# EAGLE board Adafruit CLUE nRF52840 Express (EAGLE 9.4.1)
REV: C
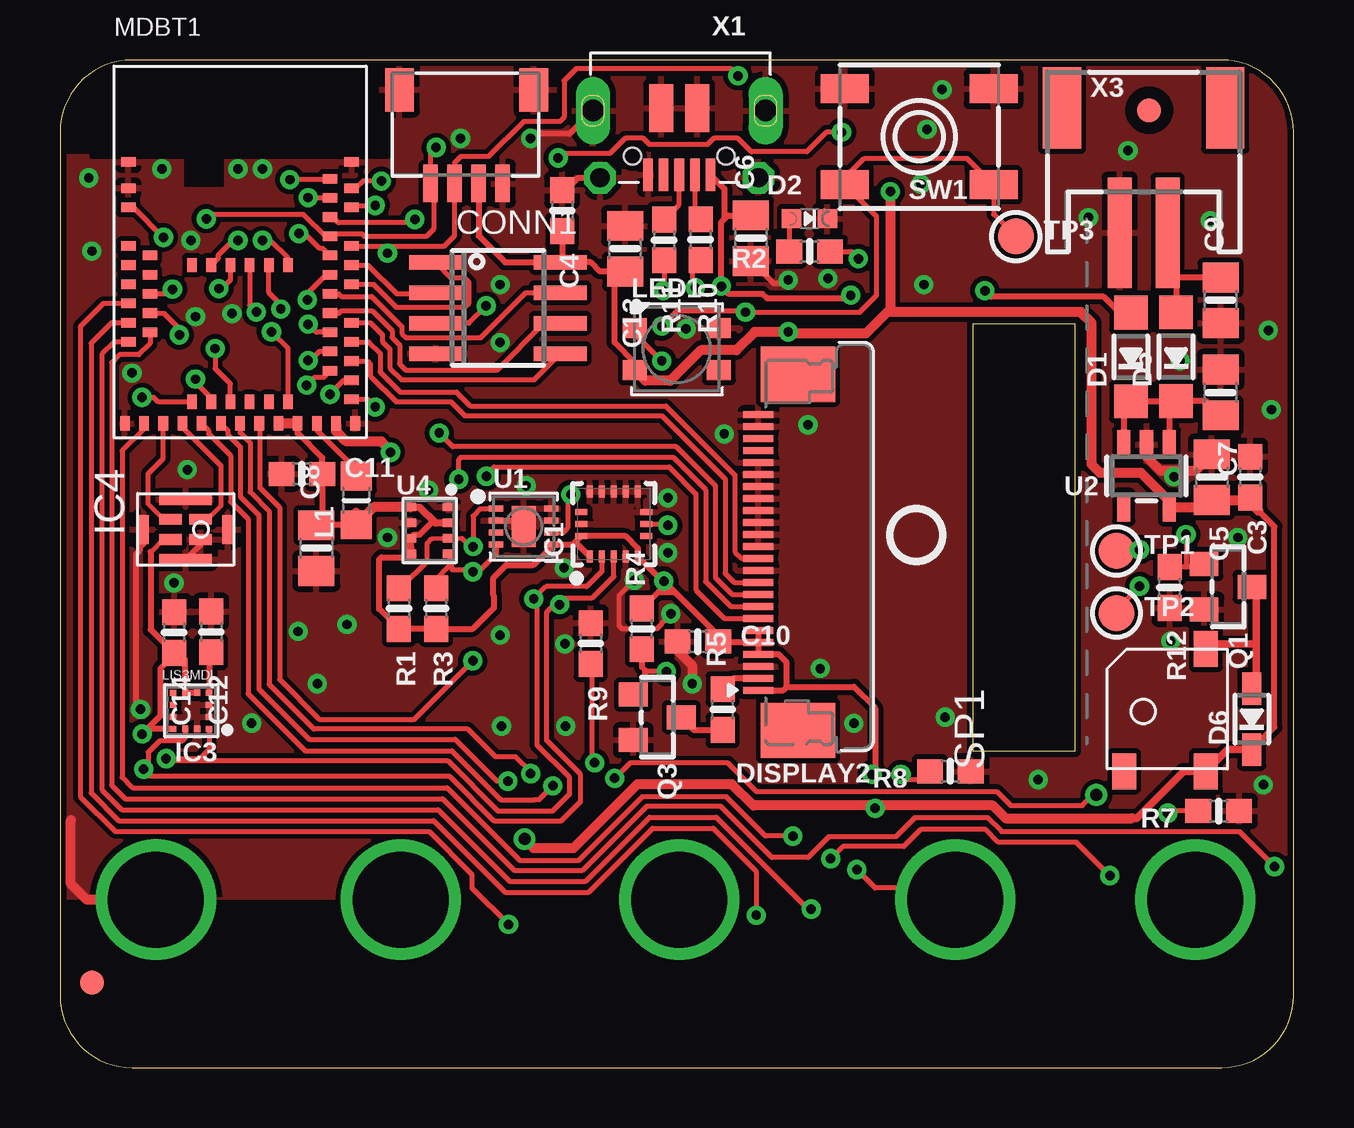
[diagram p0: board, top side]
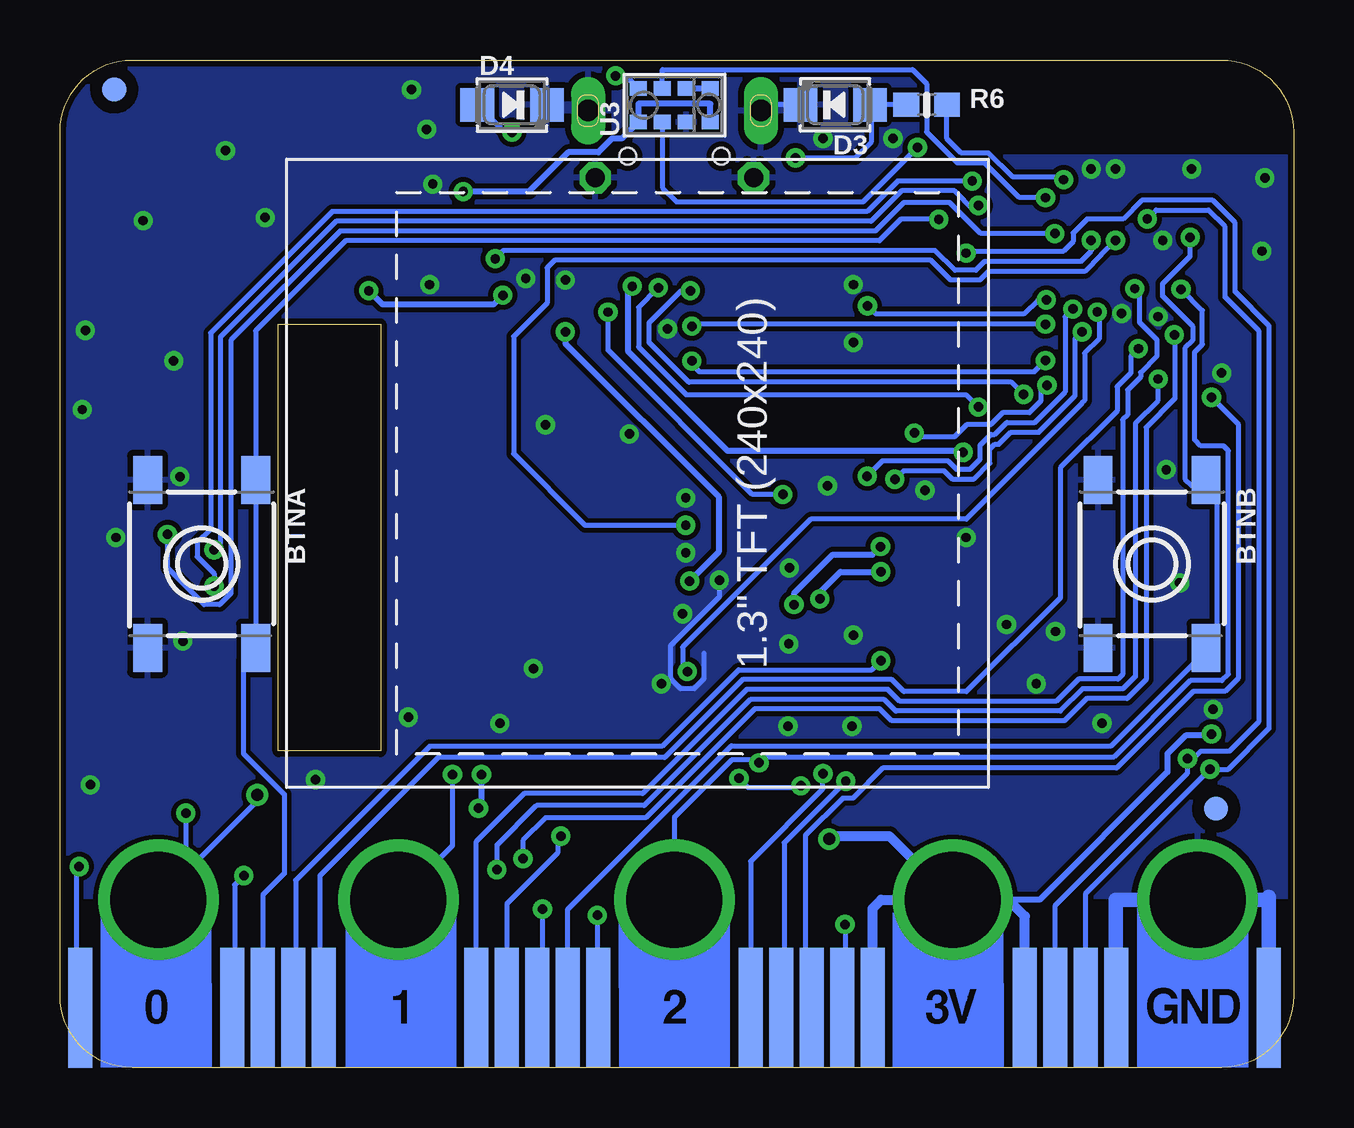
[diagram p1: board, bottom side, seen from below]

Size 51.4 x 42 mm. Coordinates in mm from the lower left corner, seen from the top.
Outline: 48.4,42 3,42 arc90 0,39 0,3 arc90 3,0 48.4,0 arc90 51.4,3 51.4,39 arc90 48.4,42
Outline: 38.04,30.99 38.04,13.2 42.3,13.2 42.3,30.99 38.04,30.99
Copper layers (1*16): Top 0.035mm / dielectric 1.5mm / Bottom 0.035mm
Design rules "adafruit": minimum track width 8mil, minimum drill 15.5mil, track to track 8mil, track to pad 8mil, pad to pad 8mil, via to via 8mil, smd to smd 8mil, copper to edge 10mil, drill to drill 8mil, minimum pad ring 10mil, minimum via ring 8mil, stop-mask expansion 2mil, vias tented up to drill 20mil, thermal gap 10mil
Net classes: 1 power: width 0.254 mm; 2 lowpower: width 0.305 mm, drill 0.483 mm

## Footprints (pad centres in the part's own frame; a part is rotated, then mirrored left to right if it is on the bottom)
6MMX6MM_TACTILE_SMT = smd 2 x 1.2: A -3.5,-2.25; A' 3.5,-2.25; B -3.5,2.25; B' 3.5,2.25
0603-NO = smd 1.075 x 1: 1 -0.85,0; 2 0.85,0
0805-NO = smd 1.24 x 1.5: 1 -0.95,0; 2 0.95,0
JST_SH4 = smd 0.6 x 1.55: 1 -1.5,2.514; 2 -0.5,2.514; 3 0.5,2.514; 4 1.5,2.514 | smd 1.2 x 1.8: MT1 -2.8,-1.386; MT2 2.8,-1.386
SOD-123 = smd 1.4 x 1.4: A 1.85,0; C -1.85,0
CHIPLED_0603_NOOUTLINE = smd 0.8 x 0.8: A 0,-0.75; C 0,0.75
EVERLIGHT_45-21 = smd 1.4 x 1.4: A -1.45,0; K 1.45,0
SOD-323 = smd 1.35 x 0.8: A 1.27,0; C -1.27,0
TFT_1.3IN_240X240_24P = smd 0.28 x 1.25: 1 4.55,13.378; 2 5.05,13.378; 3 5.55,13.378; 4 6.05,13.378; 5 6.55,13.378; 6 7.05,13.378; 7 7.55,13.378; 8 8.05,13.378; 9 8.55,13.378; 10 9.05,13.378; 11 9.55,13.378; 12 10.05,13.378; 13 10.55,13.378; 14 11.05,13.378; 15 11.55,13.378; 16 12.05,13.378; 17 12.55,13.378; 18 13.05,13.378; 19 13.55,13.378; 20 14.05,13.378; 21 14.55,13.378; 22 15.05,13.378; 23 15.55,13.378; 24 16.05,13.378 | smd 2.3 x 3.1: MNT1 2.88,11.722; MNT2 17.72,11.722
FIDUCIAL_1MM = smd 1 x 1: 1 0,0
LGA16_3X3MM = smd 0.5 x 0.25: 1 -1.35,1; 2 -1.35,0.5; 3 -1.35,0; 4 -1.35,-0.5; 5 -1.35,-1; 9 1.35,-1; 10 1.35,-0.5; 11 1.35,0; 12 1.35,0.5; 13 1.35,1 | smd 0.25 x 0.5: 6 -0.5,-1.35; 7 0,-1.35; 8 0.5,-1.35; 14 0.5,1.35; 15 0,1.35; 16 -0.5,1.35
SOIC8_150MIL = smd 0.6 x 2.2: 1 -1.905,-2.6; 2 -0.635,-2.6; 3 0.635,-2.6; 4 1.905,-2.6; 5 1.905,2.6; 6 0.635,2.6; 7 -0.635,2.6; 8 -1.905,2.6
LGA12_2X2MM = smd 0.275 x 0.25: 1 -0.75,0.75; 2 -0.75,0.25; 3 -0.75,-0.25; 4 -0.75,-0.75; 7 0.75,-0.75; 8 0.75,-0.25; 9 0.75,0.25; 10 0.75,0.75 | smd 0.25 x 0.275: 5 -0.25,-0.75; 6 0.25,-0.75; 11 0.25,0.75; 12 -0.25,0.75
SPK0415HM4H = smd 0.45 x 0.95: 1 0.425,-0.625; 2 0.425,0.625; 3 -0.425,0.625; 4 -0.425,-0.625 | smd 1.2 x 0.45: 5 0,-1.75; 7 0,1.75 | smd 0.45 x 2.2: 6 1.25,0; 8 -1.25,0
_0805MP = smd 1.2 x 1.3: 1 -1.016,0; 2 1.016,0
LED3535 = smd 1 x 0.85: 1 -1.75,0.875; 2 -1.75,-0.875; 3 1.75,-0.875; 4 1.75,0.875
MICROBIT_EDGE = smd 1 x 5: +3V3 8.255,2.5; +3V3@2 14.605,2.5; GND 18.415,2.5; GND@2 24.765,2.5; P3 -24.765,2.5; P4 -18.415,2.5; P5 -17.145,2.5; P6 -15.875,2.5; P7 -14.605,2.5; P8 -8.255,2.5; P9 -6.985,2.5; P10 -5.715,2.5; P11 -4.445,2.5; P12 -3.175,2.5; P13 3.175,2.5; P14 4.445,2.5; P15 5.715,2.5; P16 6.985,2.5; P19 15.875,2.5; P20 17.145,2.5 | drill 4: +3V3@1 11.6,7; GND@1 21.8,7; P0 -21.5,7; P1 -11.5,7; P2 0,7
MDBT50 = smd 0.6 x 0.4: 1 -4.65,3.75; 2 -4.65,2.65; 3 -4.65,1.85; 4 -4.65,0.25; 5 -3.75,-0.15; 6 -4.65,-0.55; 7 -3.75,-0.95; 8 -4.65,-1.35; 9 -3.75,-1.75; 10 -4.65,-2.15; 11 -3.75,-2.55; 12 -4.65,-2.95; 13 -3.75,-3.35; 14 -4.65,-3.75; 34 4.65,-6.15; 35 4.65,-5.35; 36 3.75,-4.95; 37 4.65,-4.55; 38 3.75,-4.15; 39 4.65,-3.75; 40 3.75,-3.35; 41 4.65,-2.95; 42 3.75,-2.55; 43 3.75,-1.75; 44 4.65,-1.35; 45 3.75,-0.95; 46 4.65,-0.55; 47 3.75,-0.15; 48 4.65,0.25; 49 3.75,0.65; 50 3.75,1.45; 51 4.65,1.85; 52 3.75,2.25; 53 4.65,2.65; 54 3.75,3.05; 55 4.65,3.75 | smd 0.4 x 0.6: 15 -4.8,-7.15; 16 -4,-7.15; 17 -3.2,-7.15; 18 -2.4,-7.15; 19 -2,-6.25; 20 -1.6,-7.15; 21 -1.2,-6.25; 22 -0.8,-7.15; 23 -0.4,-6.25; 24 0,-7.15; 25 0.4,-6.25; 26 0.8,-7.15; 27 1.2,-6.25; 28 1.6,-7.15; 29 2,-6.25; 30 2.4,-7.15; 31 3.2,-7.15; 32 4,-7.15; 33 4.8,-7.15; 56 -2,-0.55; 57 -1.2,-0.55; 58 -0.4,-0.55; 59 0.4,-0.55; 60 1.2,-0.55; 61 2,-0.55
SOT23-WIDE = smd 1 x 1.2: 1 -0.95,-1; 2 0.95,-1; 3 0,1
BUZZER_SMT_5MM = smd 1.5 x 1: + -2.6,-1.6; - 2.5,-1.6; MT -2.6,1.8
EVQ-Q2_SMALLER = smd 2 x 1.2: A -3.1,-2; A' 3.1,-2; B -3.1,2; B' 3.1,2
TESTPOINT_ROUND_1.5MM = smd 1.5 x 1.5: P$1 0,0
SHT3X = smd 0.6 x 0.25: 1 -1.15,0.75; 2 -1.15,0.25; 3 -1.15,-0.25; 4 -1.15,-0.75; 5 1.15,-0.75; 6 1.15,-0.25; 7 1.15,0.25; 8 1.15,0.75 | smd 1 x 1.7: THERMAL 0,0
SOT23-5 = smd 0.55 x 1.2: 1 -0.95,-1.3; 2 0,-1.3; 3 0.95,-1.3; 4 0.95,1.3; 5 -0.95,1.3
APDS-9960 = smd 0.6 x 0.72: 1 0.7,1.505; 2 0.7,0.505; 3 0.7,-0.495; 4 0.7,-1.495; 5 -0.7,-1.495; 6 -0.7,-0.495; 7 -0.7,0.505; 8 -0.7,1.505
BMP280 = smd 0.5 x 0.35: 1 0.8,0.975; 2 0.8,0.325; 3 0.8,-0.325; 4 0.8,-0.975; 5 -0.8,-0.975; 6 -0.8,-0.325; 7 -0.8,0.325; 8 -0.8,0.975
4UCONN_20329_SLIM = smd 1 x 2: BASE@1 -0.75,-2; BASE@2 0.75,-2 | smd 0.4 x 1.35: D+ 0,0.775; D- -0.65,0.775; GND 1.3,0.775; ID 0.65,0.775; VBUS -1.3,0.775 | drill 0.8 pad 1.27 octagon: SPRT@1 -3.3,0.9; SPRT@2 3.3,0.9 | drill 0.9 pad 1.27 long: SPRT@3 -3.6,-1.9; SPRT@4 3.6,-1.9 | hole 0.7: -1.95,0; 1.95,0
JSTPH2 = smd 1 x 4.6: 1 -1,-3.7; 2 1,-3.7 | smd 1.6 x 3.4: NC1 -3.4,1.5; NC2 3.4,1.5

## Placement (x,y rotation side)
BTNA  6mm  [6MMX6MM_TACTILE_SMT]  45.5,21 270 bottom
BTNB  6mm  [6MMX6MM_TACTILE_SMT]  5.9,21 270 bottom
C3  0.1uF  [0603-NO]  49.59,24.61 270 top
C4  0.1uF  [0603-NO]  20.92,35.72 270 top
C5  10uF  [0805-NO]  48,24.61 270 top
C6  10uF  [0805-NO]  28.79,34.57 90 top
C7  10uF  [0805-NO]  48.36,28.14 270 top
C8  10uF  [0805-NO]  10.68,21.65 90 top
C9  10uF  [0805-NO]  48.36,31.98 90 top
C10  0.1uF  [0603-NO]  26.58,17.75 0 top
C11  0.1uF  [0603-NO]  10.08,24.75 0 top
C12  0.1uF  [0603-NO]  6.3,18.17 270 top
C13  10uF  [0805-NO]  23.55,34.13 270 top
C14  0.1uF  [0603-NO]  4.75,18.13 270 top
CONN1  STEMMA_I2C_QT  [JST_SH4]  16.95,39.37 180 top
D1  MBR120  [SOD-123]  44.62,29.62 90 top
D2  RED  [CHIPLED_0603_NOOUTLINE]  31.23,35.39 270 top
D3  L130-5780001400001  [EVERLIGHT_45-21]  19.1,40.13 180 bottom
D4  L130-5780001400001  [EVERLIGHT_45-21]  32.57,40.13 0 bottom
D5  MBR120  [SOD-123]  46.5,29.64 90 top
D6  1N4148  [SOD-323]  49.66,14.53 90 top
DISPLAY2  DISP_LCD_ST7789_1.3IN  [TFT_1.3IN_240X240_24P]  42.47,11.18 90 top
FID1  FIDUCIAL_1MM  [FIDUCIAL_1MM]  1.33,3.55 0 top
FID2  FIDUCIAL_1MM  [FIDUCIAL_1MM]  45.38,39.91 0 top
FID3  FIDUCIAL_1MM  [FIDUCIAL_1MM]  49.14,40.77 0 bottom
FID4  FIDUCIAL_1MM  [FIDUCIAL_1MM]  3.23,10.79 0 bottom
IC1  LSM6DS33  [LGA16_3X3MM]  23.07,22.66 90 top
IC2  GD25Q16  [SOIC8_150MIL]  18.25,31.67 270 top
IC3  LIS3MDL  [LGA12_2X2MM]  5.46,14.88 180 top
IC4  MIC_PDM  [SPK0415HM4H]  5.23,22.43 270 top
L1  DNP  [_0805MP]  12.34,23.64 90 top
LED1  WS2812B3535  [LED3535]  25.7,29.95 0 top
MB1  MICRO:BIT_EDGE  [MICROBIT_EDGE]  25.8,0 0 bottom
MDBT1  MDBT50  [MDBT50]  7.5,34 0 top
Q1  BSS138  [SOT23-WIDE]  48.67,20.04 270 top
Q3  BSS138  [SOT23-WIDE]  24.88,14.61 270 top
R1  4.7K  [0603-NO]  14.12,19.14 270 top
R2  1K  [0603-NO]  31.23,34.02 180 top
R3  4.7K  [0603-NO]  15.67,19.14 270 top
R4  10K  [0603-NO]  24.25,18.29 90 top
R5  10  [0603-NO]  27.61,14.92 90 top
R6  10  [0603-NO]  15.29,40.13 0 bottom
R7  1Mohm  [0603-NO]  48.28,10.69 180 top
R8  1Mohm  [0603-NO]  37.1,12.36 180 top
R9  1Mohm  [0603-NO]  22.11,17.68 270 top
R10  22  [0603-NO]  26.69,34.51 270 top
R11  22  [0603-NO]  25.17,34.5 270 top
R12  10K  [0603-NO]  46.23,20.02 270 top
SP1  SPEAKER_BUZZER5MM  [BUZZER_SMT_5MM]  46.14,14.95 90 top
SW1  KMR2  [EVQ-Q2_SMALLER]  35.8,38.8 180 top
TP1  [TESTPOINT_ROUND_1.5MM]  44.02,21.54 0 top
TP2  [TESTPOINT_ROUND_1.5MM]  44.02,18.95 0 top
TP3  [TESTPOINT_ROUND_1.5MM]  39.83,34.65 0 top
U1  SHT30  [SHT3X]  19.32,22.56 0 top
U2  AP2112(3.3V)  [SOT23-5]  45.27,24.67 180 top
U3  APDS-9960  [APDS-9960]  25.8,40.12 90 bottom
U4  BMP280  [BMP280]  15.4,22.39 0 top
U$10  [PCBFEAT-REV-056]  35.68,22.21 0 top
U$37  [CLUE_BACK]  -0.2,0 0 top
U$52  [CLUE_FRONT]  51.4,0 0 bottom
X1  4u20329  [4UCONN_20329_SLIM]  25.8,37.99 180 top
X3  JSTPH  [JSTPH2]  45.15,38.5 0 top

## Library data of the parts
BTNA BTNB C3-C14 CONN1 D1-D6 IC2 IC4 L1 LED1 MDBT1 Q1 Q3 R1-R12 SP1 SW1 TP1-TP3 U1 U2 U$10 X1 X3 = microbuilder
DISPLAY2 = adafruit_display
FID1-FID4 = microbuilder; BOM: EXCLUDE
IC1 IC3 U3 U4 = adafruit_sensor
MB1 = adafruit_connector
U$37 U$52 = silks

## Nets
3.3V [power]: C3.2 C4.2 C5.2 C8.2 C10.2 C11.2 C13.2 C14.2 CONN1.2 D6.C DISPLAY2.1 DISPLAY2.4 DISPLAY2.5 DISPLAY2.6 IC1.1 IC1.5 IC1.16 IC2.8 IC3.5 IC3.6 IC3.10 IC4.1 L1.1 LED1.2 MB1.+3V3 MB1.+3V3@1 MB1.+3V3@2 MDBT1.28 MDBT1.30 R1.2 R3.2 R4.2 SP1.+ U1.5 U2.5 U3.5 U3.8 U4.2 U4.5 U4.6 U4.8
APDS_IRQ: MDBT1.52 U3.2
BACKLIGHT: MDBT1.59 Q3.1 R4.1
CAP1: C12.2 IC3.4
D0/AIN2: MB1.P0 MDBT1.20 R7.2
D1/AIN3: MB1.P1 MDBT1.21 R8.2
D2/AIN4: MB1.P2 MDBT1.9 R9.2
D3/AIN5: MB1.P3 MDBT1.13
D4/AIN6: MB1.P4 MDBT1.11
D5/BUTTON_A: BTNA.B BTNA.B' MB1.P5 MDBT1.50
D6: MB1.P6 MDBT1.26
D7: MB1.P7 MDBT1.23
D8: MB1.P8 MDBT1.58
D9: MB1.P9 MDBT1.16
D10/AIN7: MB1.P10 MDBT1.14
D11/BUTTON_B: BTNB.B BTNB.B' MB1.P11 MDBT1.3
D12/AIN0: MB1.P12 MDBT1.12
D13/SCK: MB1.P13 MDBT1.24
D14/MISO: MB1.P14 MDBT1.22
D15/MOSI: MB1.P15 MDBT1.19
D16/AIN1: MB1.P16 MDBT1.10
D19/SCL: CONN1.4 IC1.2 IC3.1 MB1.P19 MDBT1.49 R3.1 U1.4 U3.7 U4.4
D20/SDA: CONN1.3 IC1.3 IC3.11 MB1.P20 MDBT1.48 R1.1 U1.1 U3.1 U4.3
D+: R11.1 X1.D+
D-: R10.1 X1.D-
DCCH: L1.2 MDBT1.31
GND: BTNA.A BTNA.A' BTNB.A BTNB.A' C3.1 C4.1 C5.1 C6.1 C7.1 C8.1 C9.1 C10.1 C11.1 C12.1 C13.1 C14.1 CONN1.1 CONN1.MT1 CONN1.MT2 D2.C D3.K D4.K DISPLAY2.3 DISPLAY2.11 DISPLAY2.13 DISPLAY2.14 DISPLAY2.15 DISPLAY2.16 DISPLAY2.17 DISPLAY2.18 DISPLAY2.19 DISPLAY2.20 DISPLAY2.23 DISPLAY2.24 IC1.4 IC1.8 IC1.9 IC1.10 IC1.11 IC1.12 IC1.13 IC1.15 IC2.4 IC3.2 IC3.3 IC3.9 IC3.12 IC4.2 IC4.5 IC4.6 IC4.7 IC4.8 LED1.4 MB1.GND MB1.GND@1 MB1.GND@2 MDBT1.1 MDBT1.2 MDBT1.15 MDBT1.33 MDBT1.55 Q1.2 Q3.2 R7.1 R8.1 R9.1 R12.2 SW1.A SW1.A' U1.2 U1.7 U1.8 U1.THERMAL U2.2 U3.6 U4.1 U4.7 X1.BASE@1 X1.BASE@2 X1.GND X1.SPRT@1 X1.SPRT@2 X1.SPRT@3 X1.SPRT@4 X3.1
LED1: MDBT1.61 R2.1
LEDK: DISPLAY2.2 R5.2
LSM_IRQ: IC1.7 MDBT1.57
N$1: Q3.3 R5.1
N$2: U3.3 U3.4
N$3: D3.A D4.A R6.1
N$4: D6.A Q1.3 SP1.-
N$5: D2.A R2.2
NEOPIX: LED1.1 MDBT1.38
PDM_CLK: IC4.3 MDBT1.18
PDM_DAT: IC4.4 MDBT1.17
QSPI_CS: IC2.1 MDBT1.44
QSPI_DATA0: IC2.5 MDBT1.41
QSPI_DATA1: IC2.2 MDBT1.46
QSPI_DATA2: IC2.3 MDBT1.45
QSPI_DATA3: IC2.7 MDBT1.43
QSPI_SCK: IC2.6 MDBT1.42
RESET: MDBT1.40 SW1.B SW1.B' TP3.P$1 U1.6
SPKR: MDBT1.47 Q1.1 R12.1
SWCLK: MDBT1.53 TP2.P$1
SWDIO: MDBT1.51 TP1.P$1
TFT_CS: DISPLAY2.8 MDBT1.29
TFT_DC: DISPLAY2.10 MDBT1.37
TFT_MOSI: DISPLAY2.12 MDBT1.39
TFT_RESET: DISPLAY2.7 MDBT1.60
TFT_SCK: DISPLAY2.9 MDBT1.36
USBD+: MDBT1.35 R11.2
USBD-: MDBT1.34 R10.2
VBAT [power]: C9.2 D5.A X3.2
VBUS [power]: C6.2 D1.A MDBT1.32 X1.VBUS
VHI [power]: C7.2 D1.C D5.C U2.1 U2.3
WHITE_LED: MDBT1.54 R6.2

## Tracks (layer width: path | path; a pad name or v marks a point on that pad's centre or on a via)
3.3V  (via drill 0.39, 0.5)
  Top 0.178: IC4.1 4.31,22.01 3.8,21.5 3.78,21.5
  Top 0.254: DISPLAY2.5 DISPLAY2.4 29.95,17.23 30.28,16.89 30.28,15.88 | DISPLAY2.1 30.13,15.73 30.28,15.88 | DISPLAY2.6 DISPLAY2.5 | DISPLAY2.5 27.46,17.73 C10.2 27.43,18.01 25.61,19.84 | C5.2 47.68,23.34 47.68,23.37 | 49.49,23.66 C3.2 | IC3.5 IC3.6 5.21,17 4.93,17.28 C14.2 | 21.37,21.81 U1.5 20.47,21.68 19.74,20.95 18.6,20.95 18.05,20.41 18.05,19.68 18.09,19.65 18.09,19.18 17.2,18.29 R3.2 R1.2 13.29,19.12 13.29,21.18 13.39,21.27 14.69,21.27 | 21.37,21.81 IC1.16 23.57,22.16 24.07,21.65 IC1.5 25.1,20.28 v25.16,20.28 25.61,19.84 | IC1.1 21.57,21.81 21.37,21.81 | CONN1.2 17.45,34.68 18.55,33.57 IC2.8 | C4.2 20.92,33.65 IC2.8 | C13.2 23.3,33.19 | 23.3,33.19 22.5,33.19 22.11,33.57 IC2.8 | LED1.2 23.95,29.38 23.11,30.23 23.11,32.99 23.3,33.19 | U2.5 46.22,23.62 | R4.2 24.95,19.84 25.61,19.84 | 12.33,23.12 L1.1 10.71,22.63 C8.2 10.93,22.85 C11.2 10.93,25.42 9.9,26.45 MDBT1.30 | IC3.10 3.64,14.12 v3.42,13.91 4.19,14.67 4.19,16.64 4.75,17.2 C14.2 | C14.2 3.78,18.26 3.78,21.5 | U4.6 14.75,22.21 14.99,22.21 15.49,22.71 15.63,22.71 | D6.C 50.6,14.2 50.6,22.55 49.93,23.22 | 30.28,15.88 33.07,15.88 33.96,14.99 33.96,12.35 v33.84,12.22 | 33.96,10.92 v33.96,10.81
  Top 0.305: U4.5 14.61,21.4 | 14.61,21.4 14.69,21.27 | 14.61,21.4 U4.6 | U4.8 15,23.35 15.63,22.71 15.65,22.7 U4.2 | 44.67,10.39 44.86,10.39 46.82,12.35 SP1.+ 48.65,13.26 D6.C
  Top 0.406: MDBT1.30 MDBT1.28 | U2.5 47.68,23.37 | C5.2 49.49,23.66 49.93,23.22 | LED1.2 24.4,28.63 25.43,28.63 26.7,29.91 28.18,29.91 28.95,30.67 v30.34,30.67 30.41,30.61 33.58,30.61 34.47,31.5 34.6,31.5 | 46.22,23.62 45.05,24.79 43.34,24.79 42.98,25.15 42.98,31.05 42.54,31.5 34.6,31.5 | v34.6,36.52 34.6,31.5 | v19.36,9.53 19.74,9.14 21.39,9.14 24.06,11.81 28,11.81 28.89,10.92 33.96,10.92 38.87,10.92 39.4,10.39 44.67,10.39 | 12.33,23.12 12.34,23.11 L1.1 13.08,23.37 U4.8
  Bottom 0.254: U3.5 24.3,40.18 27.3,40.18 U3.8 28,38.72 28.4,38.72 28.97,38.15 30.23,38.15 31.86,36.52 v34.6,36.52 | v25.16,20.28 23.96,21.49 23.96,23.8 30.34,30.19 v30.34,30.67 | v3.42,13.91 3.49,13.84 4.5,13.84 5.26,13.08 5.26,12.32 10.58,7 13.77,7 | v33.96,10.81 33.84,10.94 v33.84,12.22
  Bottom 0.406: MB1.+3V3@2 11.2,6.32 11.88,7 13.77,7 MB1.+3V3@1 | MB1.+3V3 17.55,6.64 17.18,7 MB1.+3V3@1 | v19.36,9.53 19.23,9.65 16.85,9.65 MB1.+3V3@1
APDS_IRQ  (via drill 0.39)
  Top 0.203: MDBT1.52 10.36,36.25 v10.34,36.27
  Bottom 0.203: v10.34,36.27 11.43,36.27 12.88,37.72 14.01,37.72 15.29,39 15.29,41.01 15.88,41.6 26.3,41.6 U3.2
BACKLIGHT  (via drill 0.39)
  Top 0.203: MDBT1.59 7.9,31.78 v8.18,31.5 | v25.26,16.51 24.44,16.51 24.38,16.57 24.25,16.7
  Top 0.254: R4.1 24.25,16.7 | 24.38,16.57 24.38,16.05 Q3.1
  Bottom 0.203: v8.18,31.5 8.11,31.42 8.11,30.38 8.7,29.78 8.7,27.81 8.82,27.7 8.82,27.69 13.64,22.87 20.11,22.87 25.45,17.53 25.45,16.7 v25.26,16.51
CAP1
  Top 0.254: C12.2 6.21,17.23 IC3.4
D0/AIN2  (via drill 0.39, 0.5)
  Top 0.203: v43.18,11.37 43.04,11.37 42.6,10.92 39.61,10.92 39.02,11.51 29.01,11.51 27.83,12.7 23.75,12.7 v23.11,12.06 | v20.53,11.75 19.95,11.16 19.77,11.16 19.78,11.17 18.37,11.17 16.33,13.21 10.21,13.21 7.84,15.59 7.84,22.86 7.11,23.59 7.11,25.51 6.19,26.42 6.19,26.55 MDBT1.20 | R7.2 46.15,10.69 v46.15,10.6
  Bottom 0.203: v43.18,11.37 43.18,11.12 MB1.P0 46.15,8.14 v46.15,10.6 | v23.11,12.06 22.73,11.68 20.6,11.68 v20.53,11.75
D1/AIN3  (via drill 0.39)
  Top 0.203: MDBT1.21 6.3,27.92 5.64,28.57 v5.64,28.7 | v33.2,8.26 33.96,7.49 36.81,7.49 MB1.P1 | v35.04,12.22 35.26,12 35.89,12 R8.2
  Bottom 0.203: v5.64,28.7 5.64,27.81 6.59,26.86 6.59,16.3 7.11,15.79 8.79,15.79 9.72,14.86 16.57,14.86 17.08,15.37 22.62,15.37 27.06,10.92 31.55,10.92 33.2,9.27 v33.2,8.26 | MB1.P1 35.04,9.26 v35.04,12.22
D2/AIN4  (via drill 0.39)
  Top 0.203: v4.69,32.45 4.49,32.25 MDBT1.9 | R9.2 22.15,16.79 22.15,12.83 v22.28,12.71
  Bottom 0.203: MB1.P2 25.8,10.43 23.4,12.83 22.28,12.83 v22.28,12.71 22.03,12.96 7.47,12.96 4.3,16.13 2.98,16.13 2.72,16.39 2.72,25.72 2.92,25.91 3.86,25.91 4.12,26.17 4.12,29.82 3.8,30.14 3.8,31.56 v4.69,32.45
D3/AIN5  (via drill 0.39)
  Top 0.203: MDBT1.13 3.75,30.18 3.29,29.72 2.47,29.72 2.15,29.4 2.15,11.78 2.71,11.21 15.94,11.21 18.92,8.23 21.77,8.23 24.44,10.9 27.52,10.9 29.66,8.76 31.17,8.76 32.03,9.62 34.82,9.62 35.61,10.41 38.66,10.41 39.23,9.84 49.14,9.84 v50.6,8.38
  Bottom 0.203: v50.6,8.38 50.73,8.26 50.73,2.66 MB1.P3
D4/AIN6  (via drill 0.39)
  Top 0.203: v4.97,30.54 4.97,30.8 4.32,31.45 MDBT1.11 | v32.11,8.71 32.62,9.22 35.16,9.22 35.87,9.93 38.58,9.93 39.1,9.4 42.34,9.4 v43.74,8
  Bottom 0.203: v32.11,8.71 32.11,9.47 31.17,10.41 26.99,10.41 22.45,14.96 17.25,14.96 16.74,14.45 9.55,14.45 8.62,15.38 6.94,15.38 6.15,16.17 6.15,26.69 4.94,27.9 4.94,30.54 v4.97,30.54 | v43.74,8 44.12,7.62 44.12,2.59 MB1.P4
D5/BUTTON_A  (via drill 0.39)
  Top 0.203: MDBT1.50 11.37,35.45 11.6,35.22 14.64,35.22 v14.79,35.36
  Bottom 0.203: MB1.P5 42.95,7.2 42.06,8.09 42.06,11.39 43.76,13.1 43.76,16.99 BTNA.B' BTNA.B 43.25,30.72 39.5,34.47 17.26,34.47 16.37,35.36 v14.79,35.36
D6  (via drill 0.39)
  Top 0.203: MDBT1.26 8.33,26.82 8.33,24.18 9.15,23.35 9.15,16.18 10.81,14.52 14.76,14.52 v17.2,16.96
  Bottom 0.203: MB1.P6 41.67,2 41.58,1.91 41.58,7.81 36,13.39 26.31,13.39 23.12,16.59 17.57,16.59 v17.2,16.96
D7  (via drill 0.39)
  Top 0.203: MDBT1.23 7.1,28.51 6.47,29.14 v6.47,29.97
  Bottom 0.203: v6.47,29.97 6.79,29.65 6.79,28.96 7.36,28.38 7.36,27.38 9.72,25.01 9.72,19.59 13.63,15.67 16.23,15.67 16.74,16.18 22.95,16.18 26.21,12.92 35.64,12.92 40.57,8 40.57,2.66 MB1.P7
D8  (via drill 0.39)
  Top 0.203: MDBT1.58 7.1,32.83 6.75,32.47 v6.62,32.47
  Bottom 0.203: MB1.P8 34.05,9.43 32.06,11.43 27.13,11.43 22.78,15.77 16.91,15.77 16.4,15.27 9.89,15.27 8.96,16.2 7.31,16.2 7.12,16.39 7.12,27.01 6.92,27.21 6.92,28.25 6.38,28.79 6.38,28.98 5.7,29.66 5.7,30.35 6.43,31.08 6.43,32.28 v6.62,32.47
D9  (via drill 0.39)
  Top 0.203: MDBT1.16 3.5,26.62 2.59,25.72 2.59,12.09 3.02,11.67 16.13,11.67 19.16,8.64 21.61,8.64 24.27,11.3 27.74,11.3 29.39,9.65 v30.53,9.65
  Bottom 0.203: v30.53,9.65 30.66,9.53 30.66,8.94 32.78,6.82 MB1.P9
D10/AIN7  (via drill 0.39)
  Top 0.203: MDBT1.14 2.25,30.25 1.74,29.74 1.74,11.59 2.57,10.75 15.75,10.75 18.73,7.77 21.9,7.77 24.57,10.44 27.33,10.44 31.17,6.6 v31.3,6.6
  Bottom 0.203: v31.3,6.6 31.3,2.72 MB1.P10
D11/BUTTON_B  (via drill 0.39)
  Top 0.203: v4.31,34.61 3.07,35.85 MDBT1.3
  Bottom 0.203: MB1.P11 30.25,6.59 23.42,13.41 7.6,13.41 3.36,17.65 3.52,17.65 3.65,17.53 BTNB.B' 3.2,17.95 3.2,24.05 BTNB.B 3.9,24.26 4.25,24.26 4.53,24.54 4.53,29.99 4.21,30.31 4.21,30.91 5.46,32.16 5.46,32.68 4.31,33.83 v4.31,34.61
D12/AIN0  (via drill 0.39)
  Top 0.203: MDBT1.12 2.15,31.05 1.3,30.2 1.3,11.45 2.45,10.29 15.57,10.29 18.55,7.32 22.03,7.32 24.69,9.98 27.21,9.98 29.01,8.19 v29.01,6.35
  Bottom 0.203: v29.01,6.35 29.01,2.54 MB1.P12
D13/SCK  (via drill 0.39)
  Top 0.203: v19.61,12.26 19.61,12.32 18.98,12.95 18.15,12.95 16.99,14.12 10.58,14.12 8.71,15.98 8.71,23.19 7.92,23.98 7.92,26.04 7.5,26.46 MDBT1.24
  Bottom 0.203: v19.61,12.26 19.61,11.62 22.62,8.61 MB1.P13
D14/MISO  (via drill 0.39)
  Top 0.203: v18.66,11.94 18.21,11.94 16.46,13.68 10.38,13.68 8.28,15.79 8.28,23.03 7.51,23.8 7.51,25.87 7,26.39 7,26.55 MDBT1.22
  Bottom 0.203: MB1.P14 21.23,2.63 21.23,9.37 v18.66,11.94
D15/MOSI  (via drill 0.39)
  Top 0.203: MDBT1.19 4.1,27.75 3.91,27.94 v3.42,27.94
  Bottom 0.203: MB1.P15 20.34,2.75 20.34,9.68 18.79,11.23 18.37,11.23 17.12,12.48 7.38,12.48 4.18,15.68 2.86,15.68 2.31,16.23 2.31,26.83 v3.42,27.94
D16/AIN1  (via drill 0.39)
  Top 0.203: MDBT1.10 1.8,31.85 0.85,30.9 0.85,11.29 2.31,9.84 15.38,9.84 17.16,8.05 17.16,7.49 v18.69,5.97
  Bottom 0.203: v18.69,5.97 18.69,2.63 MB1.P16
D19/SCL  (via drill 0.39)
  Top 0.203: R3.1 15.67,20.38 16.19,20.89 16.31,20.89 | IC1.2 22.57,20.68 21.94,20.05 20.25,20.05 v19.74,19.54 19.87,19.54 19.87,13.46 21.24,12.09 21.24,11.41 20.53,10.7 18.25,10.7 16.15,12.8 4.42,12.8 v4.42,12.88 5.82,12.88 6.21,13.27 IC3.1 | v15.68,38.35 15.45,38.12 CONN1.4 15.57,36.73 15.57,34.95 15.28,34.66 12.68,34.66 12.58,34.76 11.36,34.76 MDBT1.49 11.06,34.65 10.15,35.56 6.28,35.56 v6.1,35.38 | U4.4 16.31,20.89 | 16.31,20.89 16.34,20.76 16.85,20.76 16.95,20.67 v17.2,20.67 17.42,20.67 18.17,21.41 U1.4
  Bottom 0.203: U3.7 26.3,36.69 25.71,36.09 17.94,36.09 v15.68,38.35 | MB1.P19 9.93,6.77 4.42,12.27 v4.42,12.88 4.3,12.75 3.85,13.2 2.67,13.2 1.46,14.4 1.46,30.73 2.85,32.11 2.85,35.05 3.55,35.75 5.73,35.75 v6.1,35.38
  Bottom 0.254: v19.74,19.54 19.74,19.81 18.88,20.67 v17.2,20.67
D20/SDA  (via drill 0.39)
  Top 0.203: MDBT1.48 13.64,34.25 | 13.64,34.25 16.02,34.25 16.45,34.68 CONN1.3 16.45,37.73 16.69,37.97 17.85,37.97 19.32,39.44 20.82,39.44 21.01,39.62 21.01,41.15 21.5,41.64 27.95,41.64 v28.25,41.35 | R1.1 14.19,19.98 15.29,21.09 15.29,21.84 15.5,22.05 U4.3 16.75,22.06 17.09,21.72 v17.21,21.72 17.21,23 17.52,23.31 U1.1 | IC1.3 23.07,20.48 22.15,19.56 21.07,19.56 v20.82,19.3 20.59,19.3 20.27,18.99 20.27,13.63 21.69,12.21 21.69,11.09 20.89,10.29 18.08,10.29 16.23,12.14 3.78,12.14 v3.48,12.44 3.68,12.63 3.68,13.14 4.15,13.62 5.09,13.62 5.21,13.74 IC3.11 | 13.64,34.25 v13.64,33.95
  Bottom 0.203: MB1.P20 8.66,7.27 v3.48,12.44 2.72,12.44 1.03,14.14 1.03,30.93 2.44,32.34 2.44,35.22 3.38,36.16 6.32,36.16 7.1,35.38 8.6,35.38 9.18,34.8 9.18,34.43 9.58,34.04 13.56,34.04 v13.64,33.95 | U3.1 27.83,41.35 v28.25,41.35
  Bottom 0.254: v20.82,19.3 20.82,19.76 19.2,21.38 17.55,21.38 v17.21,21.72
D+
  Top 0.203: R11.1 25.8,35.98 X1.D+
D-
  Top 0.203: X1.D- 26.45,35.6 R10.1
DCCH
  Top 0.203: MDBT1.31 10.7,26.57 12.34,24.93 L1.2
GND  (via drill 0.39)
  Top 0.203: v25.45,18.92 25.05,18.52 25.05,18.47 24.87,18.29 23.42,18.29 23.3,18.41 23.3,19.68 v23.93,20.32
  Top 0.254: U1.2 19.07,22.81 U1.THERMAL | C6.1 29.71,32.7 30.22,32.7 v30.34,32.83 | IC4.2 5.85,21.81 IC4.6 | IC4.5 3.48,21.85 3.32,21.69 3.32,21.56 3.17,21.4 3.17,15.12 v3.35,14.93 | C4.1 21.07,36.57 21.59,37.09 X1.SPRT@2 | X1.SPRT@4 21.23,38.92 19.8,38.92 v19.61,38.73
  Top 0.406: C10.1 25.73,17.38 26.34,16.76 v26.34,16 | U2.2 45.27,25.46 45.84,24.89 47.33,24.89 C5.1 | MB1.GND@1 1.12,7 0.46,7.66 0.46,10.32 | 10.68,20.97 C8.1
  Bottom 0.203: v23.93,20.32 23.93,19.62 25.97,17.59 25.97,16.22 25.55,15.8 24.97,15.8 24.56,16.22 24.56,17.28 | D3.K 21.96,40.13 X1.SPRT@4
  Bottom 0.61: MB1.GND@2 1.04,7.11 1.15,7 MB1.GND@1 7.41,7 7.42,6.99 7.42,2.54 MB1.GND
  other vias: 11.96,18.47 18.34,30.23 27.68,26.42 31.17,26.8 31.68,16.64 40.76,12 18.34,18.03 19.42,24.26 25.33,23.75 35.99,32.64 35.87,36.83 26.09,30.8 21.01,20.83 25.33,21.46 50.35,30.73 50.47,27.43 46.66,29.46 46.28,17.78 50.14,11.79 42.85,35.43 44.5,38.23 47.93,35.31 36.76,40.77 36.12,39.12 16.69,38.73 8.44,37.47 7.42,37.47 4.25,37.47 1.2,37.08 1.32,34.04 13.64,22.1 18.34,32.64 3,28.96 5.45,34.48 5.64,31.31 9.92,18.18 15.36,24.07 7.17,31.43 31.99,32.89 36.88,14.61 4.75,20.2 7.99,14.36 21.03,17.67 18.4,14.23 21.07,14.23 10.72,16 5.31,24.93 49.08,22.1 33.07,14.35 46.41,24.64
  pour Bottom: -0.2,7.11 51.74,7.11 51.74,42.16 13.39,42.16 13.39,37.97 -0.2,37.97
  pour Top: -0.2,7.11 51.74,7.11 51.74,42.16 13.39,42.16 13.39,37.97 -0.2,37.97
LED1  (via drill 0.39)
  Top 0.203: MDBT1.61 9.5,33.73 8.75,34.48 v8.44,34.48 | v33.27,33.72 32.96,34.02 R2.1
  Bottom 0.203: v8.44,34.48 8.44,34.04 8.87,33.6 12.88,33.6 13.24,33.24 14.12,33.24 14.94,34.06 32.92,34.06 v33.27,33.72
LEDK
  Top 0.254: DISPLAY2.2 28.07,16.23 R5.2
LSM_IRQ  (via drill 0.39)
  Top 0.203: IC1.7 25.28,22.66 v25.33,22.61 | MDBT1.57 6.59,33.74 6.59,33.88 7.2,34.48 v7.42,34.48
  Bottom 0.203: v25.33,22.61 29.52,22.61 32.5,25.59 32.5,30.48 31.11,31.88 31.11,33.34 30.79,33.66 15.11,33.66 14.29,32.83 13.08,32.83 12.71,33.19 8.71,33.19 8.03,33.87 v7.42,34.48
N$1
  Top 0.254: Q3.3 26.41,14.07 R5.1
N$2
  Bottom 0.254: U3.3 U3.4
N$3  (via drill 0.39)
  Top 0.203: v32.57,38.99 31.93,38.99 31.12,38.18 28.8,38.18 28.25,38.73 27.23,38.73 26.98,38.48 24.57,38.48 24.31,38.73 23.55,38.73 22.91,38.1 20.93,38.1 v20.75,37.92
  Bottom 0.203: R6.1 17.58,40.13 | 17.58,40.13 D3.A | D4.A 32.87,38.99 v32.57,38.99 | v20.75,37.92 18.27,37.92 17.58,38.61 17.58,40.13
N$4
  Top 0.305: Q1.3 49.84,19.87 49.84,17.65 | 49.84,17.65 49.84,15.98 D6.A | SP1.- 47.95,17.65 49.84,17.65
N$5
  Top 0.203: D2.A 30.38,35.29 R2.2
NEOPIX  (via drill 0.39)
  Top 0.203: MDBT1.38 10.81,29.85 10.43,29.48 v10.34,29.48 | v25.07,29.46 23.95,30.58 LED1.1
  Bottom 0.203: v10.34,29.48 10.81,29.01 24.76,29.01 25.07,29.33 v25.07,29.46
PDM_CLK
  Top 0.178: 6.71,23.41 6.15,22.86 IC4.3
  Top 0.203: MDBT1.18 5.1,26.7 6.7,25.1 6.7,23.42 6.71,23.41
PDM_DAT
  Top 0.178: IC4.4 4.31,22.86 3.67,23.5
  Top 0.203: MDBT1.17 4.3,25.38 3.67,24.75 3.67,23.5
QSPI_CS
  Top 0.203: MDBT1.44 13.06,32.65 14.01,31.7 16.87,31.7 17.05,31.88 17.05,32.73 16.87,32.91 16.31,32.91 IC2.1
QSPI_DATA0
  Top 0.203: MDBT1.41 12.93,31.05 13.43,30.55 13.43,30.27 13.75,29.95 13.75,29.17 14.24,28.68 19.76,28.68 IC2.5
QSPI_DATA1
  Top 0.203: MDBT1.46 12.83,33.45 14.02,32.26 15.6,32.26 IC2.2
QSPI_DATA2  (via drill 0.39)
  Top 0.203: MDBT1.45 11.1,33.05 10.3,32.26 v10.3,32 | v17.76,31.75 17.04,31.03 IC2.3
  Bottom 0.203: v17.76,31.75 17.44,31.43 11.22,31.43 10.65,32 v10.3,32
QSPI_DATA3
  Top 0.203: MDBT1.43 11.62,32.25 11.72,32.15 12.99,32.15 14.24,30.89 14.24,30.61 14.42,30.43 17.53,30.43 19.4,32.3 IC2.7
QSPI_SCK
  Top 0.203: MDBT1.42 11.62,31.45 11.72,31.55 13,31.55 13.84,30.72 13.84,30.44 14.15,30.12 14.15,29.34 14.41,29.08 18.21,29.08 20.16,31.03 IC2.6
RESET  (via drill 0.39)
  Top 0.203: MDBT1.40 10.68,30.65 v10.34,30.99 | U1.6 20.96,22.31 21.16,22.5 21.16,23.77 v21.28,23.9 | v25.07,30.91 25.73,31.56 28.5,31.56 v28.57,31.49 33.32,31.49 34.03,32.19 34.03,35.47 SW1.B' 32.7,37.09 33.52,37.91 37.79,37.91 SW1.B 38.9,35.58 TP3.P$1
  Bottom 0.203: v10.34,30.99 24.99,30.99 v25.07,30.91 | v21.28,23.9 22.55,23.9 28.57,29.91 v28.57,31.49
SPKR  (via drill 0.39)
  Top 0.203: MDBT1.47 10.96,34.15 10.82,34.15 10.2,34.77 v9.95,34.77 | Q1.1 47.54,20.86 46.92,20.86 | 46.92,20.86 R12.1 | v46.92,22.23 46.92,20.86
  Bottom 0.203: v9.95,34.77 13.03,34.77 14.33,36.07 16.24,36.07 17.43,34.87 39.73,34.87 44.28,30.33 44.28,19.77 44.75,19.3 45.39,19.3 46.92,20.83 v46.92,22.23
SWCLK  (via drill 0.39)
  Top 0.203: MDBT1.53 12.32,36.65 12.63,36.96 v13.39,36.96 | v44.98,20.07 44.02,19.11 TP2.P$1
  Bottom 0.203: v13.39,36.96 16.5,36.96 17.77,35.69 40.06,35.69 45.13,30.62 45.13,22.44 45.69,21.88 45.69,21.3 44.98,20.59 v44.98,20.07
SWDIO  (via drill 0.39)
  Top 0.203: MDBT1.51 12.24,35.94 v13.14,35.94 | v44.98,21.59 44.93,21.54 TP1.P$1
  Bottom 0.203: v13.14,35.94 13.33,35.75 14.13,36.55 16.33,36.55 17.6,35.28 39.9,35.28 44.72,30.46 44.72,21.85 v44.98,21.59
TFT_CS  (via drill 0.39)
  Top 0.203: MDBT1.29 9.5,29.98 v8.81,30.67 | v16.62,24.52 16.62,25.35 16.71,25.45 25.55,25.45 26.9,24.09 26.9,20.26 27.94,19.23 DISPLAY2.8
  Bottom 0.203: v8.81,30.67 9.11,30.37 9.11,28 10.61,26.49 11.78,26.49 12.28,25.99 12.45,25.99 12.66,25.78 12.66,25.19 13.31,24.54 14.23,24.54 14.57,24.88 16.25,24.88 v16.6,24.52 v16.62,24.52
TFT_DC
  Top 0.203: MDBT1.37 12.82,29.45 12.93,29.34 12.93,28.83 14.01,27.76 16.28,27.76 16.86,27.18 25.07,27.18 27.71,24.54 27.71,20.6 28.09,20.23 DISPLAY2.10
TFT_MOSI
  Top 0.203: MDBT1.39 12.87,30.25 13.34,29.79 13.34,29 14.18,28.16 16.52,28.16 17.09,27.58 25.24,27.58 28.12,24.7 28.12,21.5 28.4,21.23 DISPLAY2.12
TFT_RESET  (via drill 0.39)
  Top 0.203: v17.77,24.65 17.77,24.72 18.09,25.04 25.38,25.04 26.5,23.92 26.5,19.91 27.68,18.73 DISPLAY2.7 | MDBT1.60 8.7,32.31 9.2,31.81 v9.2,31.62
  Bottom 0.203: v9.2,31.62 9.52,31.3 9.52,28.16 10.78,26.9 11.95,26.9 12.45,26.4 12.61,26.4 13.07,25.95 13.07,25.36 13.48,24.95 14.06,24.95 14.4,25.29 17.14,25.29 v17.77,24.65
TFT_SCK  (via drill 0.39)
  Top 0.203: MDBT1.36 10.97,28.77 10.6,28.77 v10.28,28.45 | DISPLAY2.9 28.01,19.73 27.31,20.43 27.31,24.26 25.68,25.88 16.37,25.88 v15.8,26.45
  Bottom 0.203: v10.28,28.45 10.47,28.26 10.54,28.26 10.54,27.77 11.01,27.3 12.12,27.3 12.62,26.8 13.62,26.8 14.13,26.29 15.64,26.29 v15.8,26.45
USBD+  (via drill 0.39)
  Top 0.203: MDBT1.35 11.83,28.65 v11.25,28.07 | R11.2 25.17,32.42 v25.14,32.38
  Bottom 0.203: v11.25,28.07 11.76,28.57 25.2,28.57 26.85,30.23 26.85,31.05 25.52,32.38 v25.14,32.38
USBD-  (via drill 0.39)
  Top 0.203: R10.2 26.34,33.31 26.34,32.38 v26.47,32.51 | v13.14,27.54 12.83,27.85 MDBT1.34
  Bottom 0.203: v26.47,32.51 27.3,31.69 27.3,30.04 25.31,28.05 13.64,28.05 v13.14,27.54
VBAT
  Top 0.254: X3.2 46.15,33.37 46.5,33.02 | 46.5,33.02 D5.A | C9.2 46.59,32.93 46.5,33.02
VBUS  (via drill 0.39)
  Top 0.254: 27.68,35.38 27.56,35.25 v27.56,32.57 27.87,32.25 29.27,32.25 29.45,32.07 32.82,32.07 v32.95,32.2 | 27.68,35.38 27.83,35.52 C6.2 | X1.VBUS 27.68,36.63 27.68,35.38 | D1.A 44.15,31.47 43.49,32.13 38.79,32.13 v38.53,32.38
  Top 0.406: MDBT1.32 11.5,26.53 11.93,26.1 13.39,26.1 13.77,25.72 v13.77,25.65
  Bottom 0.254: v13.77,25.65 13.83,25.72 23.59,25.72 27.74,29.87 27.74,32.39 v27.56,32.57 | v38.53,32.38 37.96,31.81 33.34,31.81 v32.95,32.2
VHI
  Top 0.254: D5.C 46.22,27.51 U2.1 | U2.3 44.32,27.47 D1.C 46.49,27.77 D5.C | C7.2 47.77,27.79 D5.C
WHITE_LED  (via drill 0.39)
  Top 0.203: MDBT1.54 11.21,37.01 v9.58,37.01
  Bottom 0.203: v9.58,37.01 9.58,37.14 11.73,37.14 12.71,38.12 13.84,38.12 14.44,38.73 R6.2